# EAGLE board MAX3232_Breakout_Panel_v11 (EAGLE 7.1.0), part 1 of 3
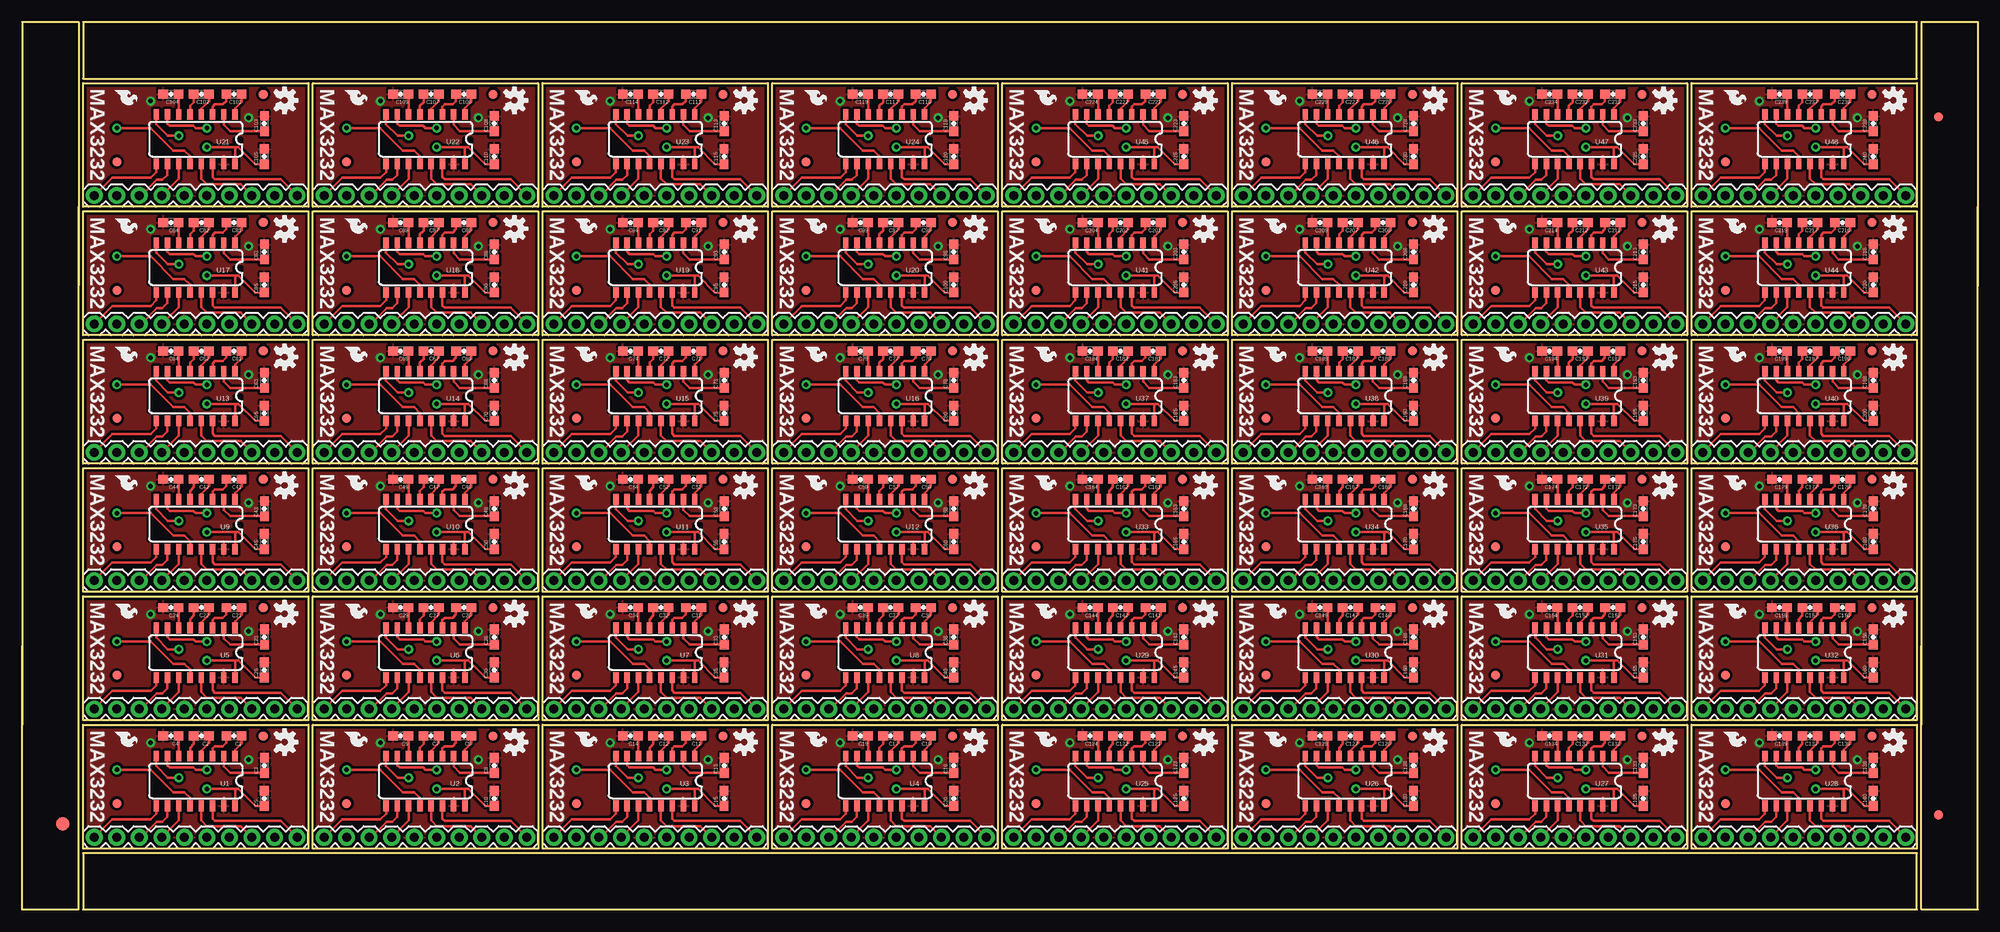
[diagram p0: board, top side]
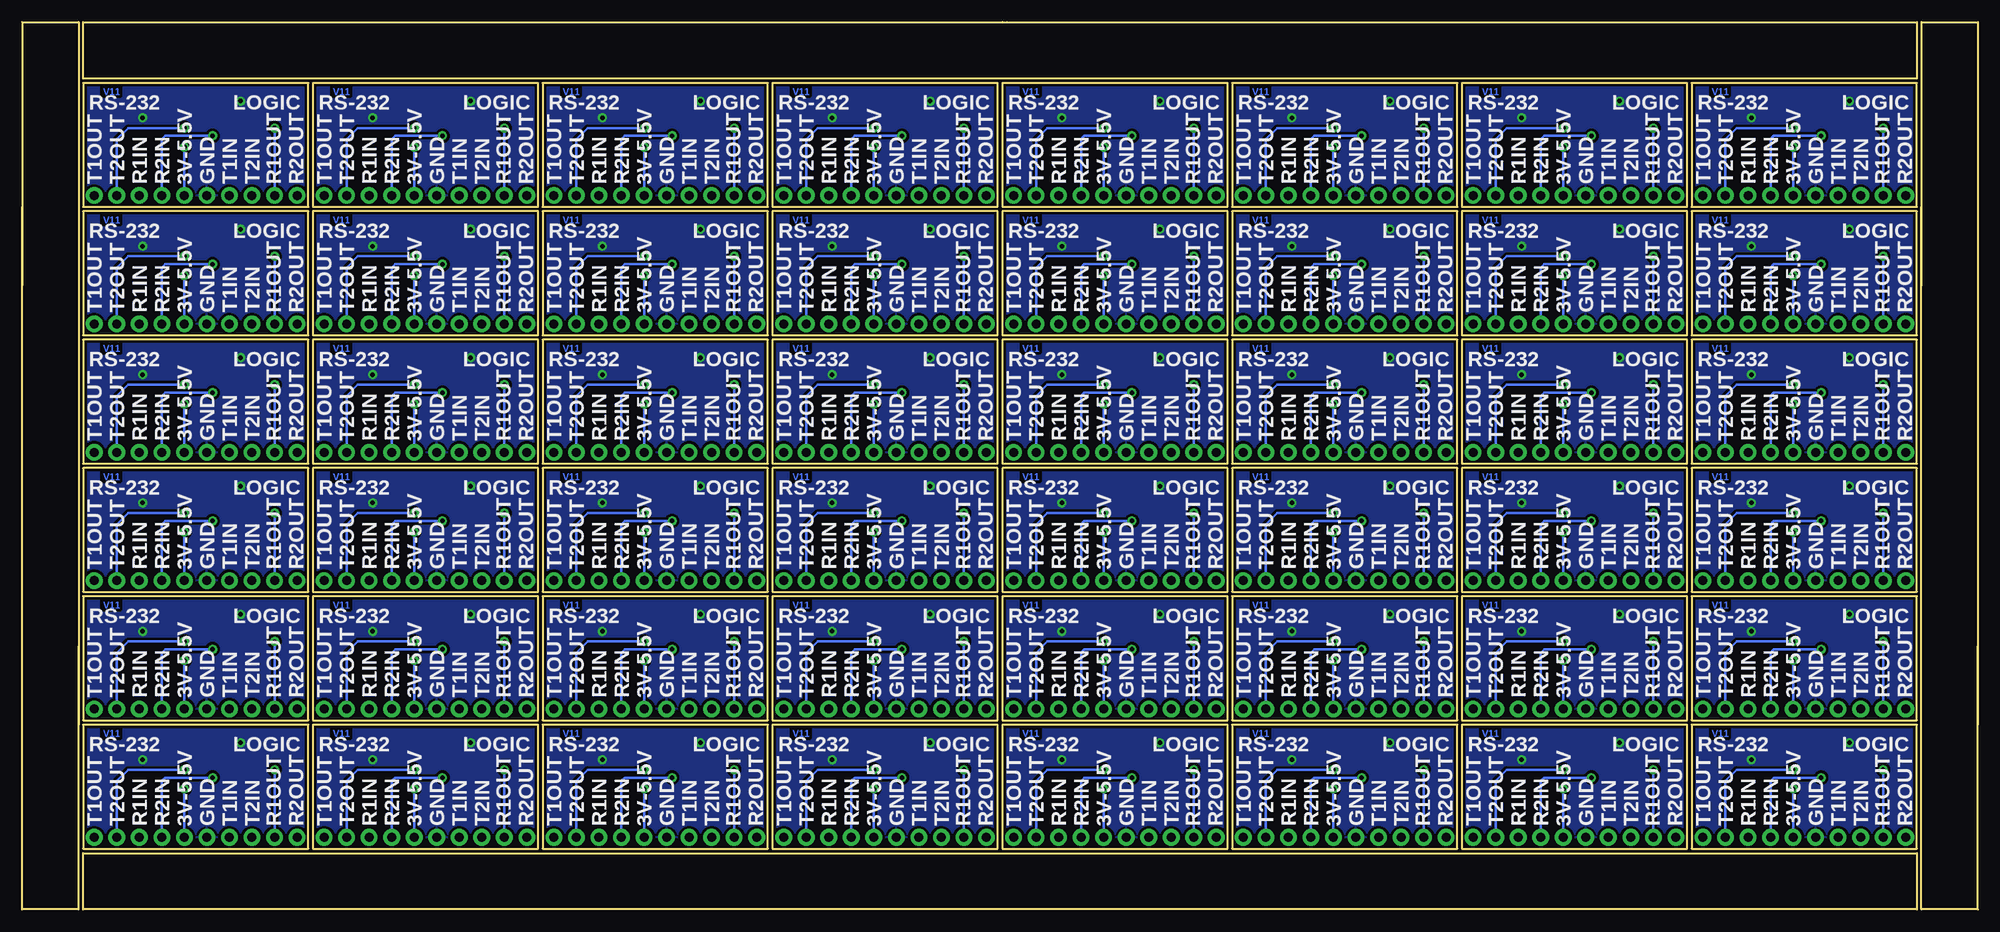
[diagram p1: board, bottom side, seen from below]

Size 220.47 x 100.08 mm. Coordinates in mm from the lower left corner, seen from the top.
Outline: 214 segments
Copper layers (1*16): Top 0.035mm / dielectric 1.5mm / Bottom 0.035mm
Design rules "SparkFun-2-layer": minimum track width 7mil, minimum drill 15mil, track to track 8mil, track to pad 8mil, pad to pad 8mil, via to via 8mil, smd to smd 8mil, copper to edge 8mil, drill to drill 8mil, minimum pad ring 12mil, minimum via ring 10mil, stop-mask expansion 4mil, vias tented up to drill 20mil, thermal gap 10mil
tRestrict: area 24,14.1 to 24.6,14.5; area 14.4,12.7 to 14.5,15.4; area 49.9,14.1 to 50.5,14.5; area 40.3,12.7 to 40.4,15.4; area 75.8,14.1 to 76.5,14.5; area 66.2,12.7 to 66.3,15.4; area 101.7,14.1 to 102.4,14.5; area 92.1,12.7 to 92.2,15.4; area 24,28.6 to 24.6,29; area 14.4,27.2 to 14.5,29.8; area 49.9,28.6 to 50.5,29; area 40.3,27.2 to 40.4,29.8; 36 more areas

## Footprints (pad centres in the part's own frame; a part is rotated, then mirrored left to right if it is on the bottom)
0603-CAP = smd 1.1 x 1: 1 -0.85,0; 2 0.85,0
FIDUCIAL-1.5X3 = smd 1.5 x 1.5: 1 0,0
FIDUCIAL-1X2 = smd 1 x 1: 1 0,0
1X10 = drill 1.016 pad 1.88: 1 0,0; 2 2.54,0; 3 5.08,0; 4 7.62,0; 5 10.16,0; 6 12.7,0; 7 15.24,0; 8 17.78,0; 9 20.32,0; 10 22.86,0
SO016 = smd 0.6 x 1.2: 1 -4.445,-2.8; 2 -3.175,-2.8; 3 -1.905,-2.8; 4 -0.635,-2.8; 5 0.635,-2.8; 6 1.905,-2.8; 7 3.175,-2.8; 8 4.445,-2.8; 9 4.445,2.8; 10 3.175,2.8; 11 1.905,2.8; 12 0.635,2.8; 13 -0.635,2.8; 14 -1.905,2.8; 15 -3.175,2.8; 16 -4.445,2.8

## Placement (x,y rotation side)
C1  .1uF  [0603-CAP]  23.88,19.56 180 top
C2  .1uF  [0603-CAP]  20.19,19.56 180 top
C3  .1uF  [0603-CAP]  27.31,16.25 90 top
C4  .1uF  [0603-CAP]  16.76,19.56 180 top
C5  .1uF  [0603-CAP]  27.31,12.53 90 top
C6  .1uF  [0603-CAP]  49.78,19.56 180 top
C7  .1uF  [0603-CAP]  46.1,19.56 180 top
C8  .1uF  [0603-CAP]  53.22,16.25 90 top
C9  .1uF  [0603-CAP]  42.67,19.56 180 top
C10  .1uF  [0603-CAP]  53.22,12.53 90 top
C11  .1uF  [0603-CAP]  75.69,19.56 180 top
C12  .1uF  [0603-CAP]  72.01,19.56 180 top
C13  .1uF  [0603-CAP]  79.13,16.25 90 top
C14  .1uF  [0603-CAP]  68.58,19.56 180 top
C15  .1uF  [0603-CAP]  79.13,12.53 90 top
C16  .1uF  [0603-CAP]  101.6,19.56 180 top
C17  .1uF  [0603-CAP]  97.92,19.56 180 top
C18  .1uF  [0603-CAP]  105.04,16.25 90 top
C19  .1uF  [0603-CAP]  94.49,19.56 180 top
C20  .1uF  [0603-CAP]  105.03,12.53 90 top
C21  .1uF  [0603-CAP]  23.88,34.04 180 top
C22  .1uF  [0603-CAP]  20.19,34.04 180 top
C23  .1uF  [0603-CAP]  27.31,30.72 90 top
C24  .1uF  [0603-CAP]  16.76,34.04 180 top
C25  .1uF  [0603-CAP]  27.31,27.01 90 top
C26  .1uF  [0603-CAP]  49.78,34.04 180 top
C27  .1uF  [0603-CAP]  46.1,34.04 180 top
C28  .1uF  [0603-CAP]  53.22,30.72 90 top
C29  .1uF  [0603-CAP]  42.67,34.04 180 top
C30  .1uF  [0603-CAP]  53.22,27.01 90 top
C31  .1uF  [0603-CAP]  75.69,34.04 180 top
C32  .1uF  [0603-CAP]  72.01,34.04 180 top
C33  .1uF  [0603-CAP]  79.13,30.72 90 top
C34  .1uF  [0603-CAP]  68.58,34.04 180 top
C35  .1uF  [0603-CAP]  79.13,27.01 90 top
C36  .1uF  [0603-CAP]  101.6,34.04 180 top
C37  .1uF  [0603-CAP]  97.92,34.04 180 top
C38  .1uF  [0603-CAP]  105.04,30.72 90 top
C39  .1uF  [0603-CAP]  94.49,34.04 180 top
C40  .1uF  [0603-CAP]  105.03,27.01 90 top
C41  .1uF  [0603-CAP]  23.88,48.51 180 top
C42  .1uF  [0603-CAP]  20.19,48.51 180 top
C43  .1uF  [0603-CAP]  27.31,45.2 90 top
C44  .1uF  [0603-CAP]  16.76,48.51 180 top
C45  .1uF  [0603-CAP]  27.31,41.48 90 top
C46  .1uF  [0603-CAP]  49.78,48.51 180 top
C47  .1uF  [0603-CAP]  46.1,48.51 180 top
C48  .1uF  [0603-CAP]  53.22,45.2 90 top
C49  .1uF  [0603-CAP]  42.67,48.51 180 top
C50  .1uF  [0603-CAP]  53.22,41.48 90 top
C51  .1uF  [0603-CAP]  75.69,48.51 180 top
C52  .1uF  [0603-CAP]  72.01,48.51 180 top
C53  .1uF  [0603-CAP]  79.13,45.2 90 top
C54  .1uF  [0603-CAP]  68.58,48.51 180 top
C55  .1uF  [0603-CAP]  79.13,41.48 90 top
C56  .1uF  [0603-CAP]  101.6,48.51 180 top
C57  .1uF  [0603-CAP]  97.92,48.51 180 top
C58  .1uF  [0603-CAP]  105.04,45.2 90 top
C59  .1uF  [0603-CAP]  94.49,48.51 180 top
C60  .1uF  [0603-CAP]  105.03,41.48 90 top
C61  .1uF  [0603-CAP]  23.88,62.99 180 top
C62  .1uF  [0603-CAP]  20.19,62.99 180 top
C63  .1uF  [0603-CAP]  27.31,59.68 90 top
C64  .1uF  [0603-CAP]  16.76,62.99 180 top
C65  .1uF  [0603-CAP]  27.31,55.96 90 top
C66  .1uF  [0603-CAP]  49.78,62.99 180 top
C67  .1uF  [0603-CAP]  46.1,62.99 180 top
C68  .1uF  [0603-CAP]  53.22,59.68 90 top
C69  .1uF  [0603-CAP]  42.67,62.99 180 top
C70  .1uF  [0603-CAP]  53.22,55.96 90 top
C71  .1uF  [0603-CAP]  75.69,62.99 180 top
C72  .1uF  [0603-CAP]  72.01,62.99 180 top
C73  .1uF  [0603-CAP]  79.13,59.68 90 top
C74  .1uF  [0603-CAP]  68.58,62.99 180 top
C75  .1uF  [0603-CAP]  79.13,55.96 90 top
C76  .1uF  [0603-CAP]  101.6,62.99 180 top
C77  .1uF  [0603-CAP]  97.92,62.99 180 top
C78  .1uF  [0603-CAP]  105.04,59.68 90 top
C79  .1uF  [0603-CAP]  94.49,62.99 180 top
C80  .1uF  [0603-CAP]  105.03,55.96 90 top
C81  .1uF  [0603-CAP]  23.88,77.47 180 top
C82  .1uF  [0603-CAP]  20.19,77.47 180 top
C83  .1uF  [0603-CAP]  27.31,74.16 90 top
C84  .1uF  [0603-CAP]  16.76,77.47 180 top
C85  .1uF  [0603-CAP]  27.31,70.44 90 top
C86  .1uF  [0603-CAP]  49.78,77.47 180 top
C87  .1uF  [0603-CAP]  46.1,77.47 180 top
C88  .1uF  [0603-CAP]  53.22,74.16 90 top
C89  .1uF  [0603-CAP]  42.67,77.47 180 top
C90  .1uF  [0603-CAP]  53.22,70.44 90 top
C91  .1uF  [0603-CAP]  75.69,77.47 180 top
C92  .1uF  [0603-CAP]  72.01,77.47 180 top
C93  .1uF  [0603-CAP]  79.13,74.16 90 top
C94  .1uF  [0603-CAP]  68.58,77.47 180 top
C95  .1uF  [0603-CAP]  79.13,70.44 90 top
C96  .1uF  [0603-CAP]  101.6,77.47 180 top
C97  .1uF  [0603-CAP]  97.92,77.47 180 top
C98  .1uF  [0603-CAP]  105.04,74.16 90 top
C99  .1uF  [0603-CAP]  94.49,77.47 180 top
C100  .1uF  [0603-CAP]  105.03,70.44 90 top
C101  .1uF  [0603-CAP]  23.88,91.95 180 top
C102  .1uF  [0603-CAP]  20.19,91.95 180 top
C103  .1uF  [0603-CAP]  27.31,88.64 90 top
C104  .1uF  [0603-CAP]  16.76,91.95 180 top
C105  .1uF  [0603-CAP]  27.31,84.92 90 top
C106  .1uF  [0603-CAP]  49.78,91.95 180 top
C107  .1uF  [0603-CAP]  46.1,91.95 180 top
C108  .1uF  [0603-CAP]  53.22,88.64 90 top
C109  .1uF  [0603-CAP]  42.67,91.95 180 top
C110  .1uF  [0603-CAP]  53.22,84.92 90 top
C111  .1uF  [0603-CAP]  75.69,91.95 180 top
C112  .1uF  [0603-CAP]  72.01,91.95 180 top
C113  .1uF  [0603-CAP]  79.13,88.64 90 top
C114  .1uF  [0603-CAP]  68.58,91.95 180 top
C115  .1uF  [0603-CAP]  79.13,84.92 90 top
C116  .1uF  [0603-CAP]  101.6,91.95 180 top
C117  .1uF  [0603-CAP]  97.92,91.95 180 top
C118  .1uF  [0603-CAP]  105.04,88.64 90 top
C119  .1uF  [0603-CAP]  94.49,91.95 180 top
C120  .1uF  [0603-CAP]  105.03,84.92 90 top
C121  .1uF  [0603-CAP]  127.51,19.56 180 top
C122  .1uF  [0603-CAP]  123.83,19.56 180 top
C123  .1uF  [0603-CAP]  130.94,16.25 90 top
C124  .1uF  [0603-CAP]  120.4,19.56 180 top
C125  .1uF  [0603-CAP]  130.94,12.53 90 top
C126  .1uF  [0603-CAP]  153.42,19.56 180 top
C127  .1uF  [0603-CAP]  149.73,19.56 180 top
C128  .1uF  [0603-CAP]  156.85,16.25 90 top
C129  .1uF  [0603-CAP]  146.3,19.56 180 top
C130  .1uF  [0603-CAP]  156.85,12.53 90 top
C131  .1uF  [0603-CAP]  179.32,19.56 180 top
C132  .1uF  [0603-CAP]  175.64,19.56 180 top
C133  .1uF  [0603-CAP]  182.76,16.25 90 top
C134  .1uF  [0603-CAP]  172.21,19.56 180 top
C135  .1uF  [0603-CAP]  182.76,12.53 90 top
C136  .1uF  [0603-CAP]  205.23,19.56 180 top
C137  .1uF  [0603-CAP]  201.55,19.56 180 top
C138  .1uF  [0603-CAP]  208.67,16.25 90 top
C139  .1uF  [0603-CAP]  198.12,19.56 180 top
C140  .1uF  [0603-CAP]  208.67,12.53 90 top
C141  .1uF  [0603-CAP]  127.51,34.04 180 top
C142  .1uF  [0603-CAP]  123.83,34.04 180 top
C143  .1uF  [0603-CAP]  130.94,30.72 90 top
C144  .1uF  [0603-CAP]  120.4,34.04 180 top
C145  .1uF  [0603-CAP]  130.94,27.01 90 top
C146  .1uF  [0603-CAP]  153.42,34.04 180 top
C147  .1uF  [0603-CAP]  149.73,34.04 180 top
C148  .1uF  [0603-CAP]  156.85,30.72 90 top
C149  .1uF  [0603-CAP]  146.3,34.04 180 top
C150  .1uF  [0603-CAP]  156.85,27.01 90 top
C151  .1uF  [0603-CAP]  179.32,34.04 180 top
C152  .1uF  [0603-CAP]  175.64,34.04 180 top
C153  .1uF  [0603-CAP]  182.76,30.72 90 top
C154  .1uF  [0603-CAP]  172.21,34.04 180 top
C155  .1uF  [0603-CAP]  182.76,27.01 90 top
C156  .1uF  [0603-CAP]  205.23,34.04 180 top
C157  .1uF  [0603-CAP]  201.55,34.04 180 top
C158  .1uF  [0603-CAP]  208.67,30.72 90 top
C159  .1uF  [0603-CAP]  198.12,34.04 180 top
C160  .1uF  [0603-CAP]  208.67,27.01 90 top
C161  .1uF  [0603-CAP]  127.51,48.51 180 top
C162  .1uF  [0603-CAP]  123.83,48.51 180 top
C163  .1uF  [0603-CAP]  130.94,45.2 90 top
C164  .1uF  [0603-CAP]  120.4,48.51 180 top
C165  .1uF  [0603-CAP]  130.94,41.48 90 top
C166  .1uF  [0603-CAP]  153.42,48.51 180 top
C167  .1uF  [0603-CAP]  149.73,48.51 180 top
C168  .1uF  [0603-CAP]  156.85,45.2 90 top
C169  .1uF  [0603-CAP]  146.3,48.51 180 top
C170  .1uF  [0603-CAP]  156.85,41.48 90 top
C171  .1uF  [0603-CAP]  179.32,48.51 180 top
C172  .1uF  [0603-CAP]  175.64,48.51 180 top
C173  .1uF  [0603-CAP]  182.76,45.2 90 top
C174  .1uF  [0603-CAP]  172.21,48.51 180 top
C175  .1uF  [0603-CAP]  182.76,41.48 90 top
C176  .1uF  [0603-CAP]  205.23,48.51 180 top
C177  .1uF  [0603-CAP]  201.55,48.51 180 top
C178  .1uF  [0603-CAP]  208.67,45.2 90 top
C179  .1uF  [0603-CAP]  198.12,48.51 180 top
C180  .1uF  [0603-CAP]  208.67,41.48 90 top
C181  .1uF  [0603-CAP]  127.51,62.99 180 top
C182  .1uF  [0603-CAP]  123.83,62.99 180 top
C183  .1uF  [0603-CAP]  130.94,59.68 90 top
C184  .1uF  [0603-CAP]  120.4,62.99 180 top
C185  .1uF  [0603-CAP]  130.94,55.96 90 top
C186  .1uF  [0603-CAP]  153.42,62.99 180 top
C187  .1uF  [0603-CAP]  149.73,62.99 180 top
C188  .1uF  [0603-CAP]  156.85,59.68 90 top
C189  .1uF  [0603-CAP]  146.3,62.99 180 top
C190  .1uF  [0603-CAP]  156.85,55.96 90 top
C191  .1uF  [0603-CAP]  179.32,62.99 180 top
C192  .1uF  [0603-CAP]  175.64,62.99 180 top
C193  .1uF  [0603-CAP]  182.76,59.68 90 top
C194  .1uF  [0603-CAP]  172.21,62.99 180 top
C195  .1uF  [0603-CAP]  182.76,55.96 90 top
C196  .1uF  [0603-CAP]  205.23,62.99 180 top
C197  .1uF  [0603-CAP]  201.55,62.99 180 top
C198  .1uF  [0603-CAP]  208.67,59.68 90 top
C199  .1uF  [0603-CAP]  198.12,62.99 180 top
C200  .1uF  [0603-CAP]  208.67,55.96 90 top
C201  .1uF  [0603-CAP]  127.51,77.47 180 top
C202  .1uF  [0603-CAP]  123.83,77.47 180 top
C203  .1uF  [0603-CAP]  130.94,74.16 90 top
C204  .1uF  [0603-CAP]  120.4,77.47 180 top
C205  .1uF  [0603-CAP]  130.94,70.44 90 top
C206  .1uF  [0603-CAP]  153.42,77.47 180 top
C207  .1uF  [0603-CAP]  149.73,77.47 180 top
C208  .1uF  [0603-CAP]  156.85,74.16 90 top
C209  .1uF  [0603-CAP]  146.3,77.47 180 top
C210  .1uF  [0603-CAP]  156.85,70.44 90 top
C211  .1uF  [0603-CAP]  179.32,77.47 180 top
C212  .1uF  [0603-CAP]  175.64,77.47 180 top
C213  .1uF  [0603-CAP]  182.76,74.16 90 top
C214  .1uF  [0603-CAP]  172.21,77.47 180 top
C215  .1uF  [0603-CAP]  182.76,70.44 90 top
C216  .1uF  [0603-CAP]  205.23,77.47 180 top
C217  .1uF  [0603-CAP]  201.55,77.47 180 top
C218  .1uF  [0603-CAP]  208.67,74.16 90 top
C219  .1uF  [0603-CAP]  198.12,77.47 180 top
C220  .1uF  [0603-CAP]  208.67,70.44 90 top
C221  .1uF  [0603-CAP]  127.51,91.95 180 top
C222  .1uF  [0603-CAP]  123.83,91.95 180 top
C223  .1uF  [0603-CAP]  130.94,88.64 90 top
C224  .1uF  [0603-CAP]  120.4,91.95 180 top
C225  .1uF  [0603-CAP]  130.94,84.92 90 top
C226  .1uF  [0603-CAP]  153.42,91.95 180 top
C227  .1uF  [0603-CAP]  149.73,91.95 180 top
C228  .1uF  [0603-CAP]  156.85,88.64 90 top
C229  .1uF  [0603-CAP]  146.3,91.95 180 top
C230  .1uF  [0603-CAP]  156.85,84.92 90 top
C231  .1uF  [0603-CAP]  179.32,91.95 180 top
C232  .1uF  [0603-CAP]  175.64,91.95 180 top
C233  .1uF  [0603-CAP]  182.76,88.64 90 top
C234  .1uF  [0603-CAP]  172.21,91.95 180 top
C235  .1uF  [0603-CAP]  182.76,84.92 90 top
C236  .1uF  [0603-CAP]  205.23,91.95 180 top
C237  .1uF  [0603-CAP]  201.55,91.95 180 top
C238  .1uF  [0603-CAP]  208.67,88.64 90 top
C239  .1uF  [0603-CAP]  198.12,91.95 180 top
C240  .1uF  [0603-CAP]  208.67,84.92 90 top
E$1  [FIDUCIAL-1.5X3]  4.57,9.65 0 top
E$4  [FIDUCIAL-1X2]  216.03,10.67 0 top
E$5  [FIDUCIAL-1X2]  216.03,89.41 180 top
FID1  FIDUCIAL1X2  [FIDUCIAL-1X2]  10.67,11.94 0 top
FID2  FIDUCIAL1X2  [FIDUCIAL-1X2]  27.18,19.56 0 top
FID3  FIDUCIAL1X2  [FIDUCIAL-1X2]  36.58,11.94 0 top
FID4  FIDUCIAL1X2  [FIDUCIAL-1X2]  53.09,19.56 0 top
FID5  FIDUCIAL1X2  [FIDUCIAL-1X2]  62.48,11.94 0 top
FID6  FIDUCIAL1X2  [FIDUCIAL-1X2]  78.99,19.56 0 top
FID7  FIDUCIAL1X2  [FIDUCIAL-1X2]  88.39,11.94 0 top
FID8  FIDUCIAL1X2  [FIDUCIAL-1X2]  104.9,19.56 0 top
FID9  FIDUCIAL1X2  [FIDUCIAL-1X2]  10.67,26.42 0 top
FID10  FIDUCIAL1X2  [FIDUCIAL-1X2]  27.18,34.04 0 top
FID11  FIDUCIAL1X2  [FIDUCIAL-1X2]  36.58,26.42 0 top
FID12  FIDUCIAL1X2  [FIDUCIAL-1X2]  53.09,34.04 0 top
FID13  FIDUCIAL1X2  [FIDUCIAL-1X2]  62.48,26.42 0 top
FID14  FIDUCIAL1X2  [FIDUCIAL-1X2]  78.99,34.04 0 top
FID15  FIDUCIAL1X2  [FIDUCIAL-1X2]  88.39,26.42 0 top
FID16  FIDUCIAL1X2  [FIDUCIAL-1X2]  104.9,34.04 0 top
FID17  FIDUCIAL1X2  [FIDUCIAL-1X2]  10.67,40.89 0 top
FID18  FIDUCIAL1X2  [FIDUCIAL-1X2]  27.18,48.51 0 top
FID19  FIDUCIAL1X2  [FIDUCIAL-1X2]  36.58,40.89 0 top
FID20  FIDUCIAL1X2  [FIDUCIAL-1X2]  53.09,48.51 0 top
FID21  FIDUCIAL1X2  [FIDUCIAL-1X2]  62.48,40.89 0 top
FID22  FIDUCIAL1X2  [FIDUCIAL-1X2]  78.99,48.51 0 top
FID23  FIDUCIAL1X2  [FIDUCIAL-1X2]  88.39,40.89 0 top
FID24  FIDUCIAL1X2  [FIDUCIAL-1X2]  104.9,48.51 0 top
FID25  FIDUCIAL1X2  [FIDUCIAL-1X2]  10.67,55.37 0 top
FID26  FIDUCIAL1X2  [FIDUCIAL-1X2]  27.18,62.99 0 top
FID27  FIDUCIAL1X2  [FIDUCIAL-1X2]  36.58,55.37 0 top
FID28  FIDUCIAL1X2  [FIDUCIAL-1X2]  53.09,62.99 0 top
FID29  FIDUCIAL1X2  [FIDUCIAL-1X2]  62.48,55.37 0 top
FID30  FIDUCIAL1X2  [FIDUCIAL-1X2]  78.99,62.99 0 top
FID31  FIDUCIAL1X2  [FIDUCIAL-1X2]  88.39,55.37 0 top
FID32  FIDUCIAL1X2  [FIDUCIAL-1X2]  104.9,62.99 0 top
FID33  FIDUCIAL1X2  [FIDUCIAL-1X2]  10.67,69.85 0 top
FID34  FIDUCIAL1X2  [FIDUCIAL-1X2]  27.18,77.47 0 top
FID35  FIDUCIAL1X2  [FIDUCIAL-1X2]  36.58,69.85 0 top
FID36  FIDUCIAL1X2  [FIDUCIAL-1X2]  53.09,77.47 0 top
FID37  FIDUCIAL1X2  [FIDUCIAL-1X2]  62.48,69.85 0 top
FID38  FIDUCIAL1X2  [FIDUCIAL-1X2]  78.99,77.47 0 top
FID39  FIDUCIAL1X2  [FIDUCIAL-1X2]  88.39,69.85 0 top
FID40  FIDUCIAL1X2  [FIDUCIAL-1X2]  104.9,77.47 0 top
FID41  FIDUCIAL1X2  [FIDUCIAL-1X2]  10.67,84.33 0 top
FID42  FIDUCIAL1X2  [FIDUCIAL-1X2]  27.18,91.95 0 top
FID43  FIDUCIAL1X2  [FIDUCIAL-1X2]  36.58,84.33 0 top
FID44  FIDUCIAL1X2  [FIDUCIAL-1X2]  53.09,91.95 0 top
FID45  FIDUCIAL1X2  [FIDUCIAL-1X2]  62.48,84.33 0 top
FID46  FIDUCIAL1X2  [FIDUCIAL-1X2]  78.99,91.95 0 top
FID47  FIDUCIAL1X2  [FIDUCIAL-1X2]  88.39,84.33 0 top
FID48  FIDUCIAL1X2  [FIDUCIAL-1X2]  104.9,91.95 0 top
FID49  FIDUCIAL1X2  [FIDUCIAL-1X2]  114.3,11.94 0 top
FID50  FIDUCIAL1X2  [FIDUCIAL-1X2]  130.81,19.56 0 top
FID51  FIDUCIAL1X2  [FIDUCIAL-1X2]  140.21,11.94 0 top
FID52  FIDUCIAL1X2  [FIDUCIAL-1X2]  156.72,19.56 0 top
FID53  FIDUCIAL1X2  [FIDUCIAL-1X2]  166.12,11.94 0 top
FID54  FIDUCIAL1X2  [FIDUCIAL-1X2]  182.63,19.56 0 top
FID55  FIDUCIAL1X2  [FIDUCIAL-1X2]  192.02,11.94 0 top
FID56  FIDUCIAL1X2  [FIDUCIAL-1X2]  208.53,19.56 0 top
FID57  FIDUCIAL1X2  [FIDUCIAL-1X2]  114.3,26.42 0 top
FID58  FIDUCIAL1X2  [FIDUCIAL-1X2]  130.81,34.04 0 top
FID59  FIDUCIAL1X2  [FIDUCIAL-1X2]  140.21,26.42 0 top
FID60  FIDUCIAL1X2  [FIDUCIAL-1X2]  156.72,34.04 0 top
FID61  FIDUCIAL1X2  [FIDUCIAL-1X2]  166.12,26.42 0 top
FID62  FIDUCIAL1X2  [FIDUCIAL-1X2]  182.63,34.04 0 top
FID63  FIDUCIAL1X2  [FIDUCIAL-1X2]  192.02,26.42 0 top
FID64  FIDUCIAL1X2  [FIDUCIAL-1X2]  208.53,34.04 0 top
FID65  FIDUCIAL1X2  [FIDUCIAL-1X2]  114.3,40.89 0 top
FID66  FIDUCIAL1X2  [FIDUCIAL-1X2]  130.81,48.51 0 top
FID67  FIDUCIAL1X2  [FIDUCIAL-1X2]  140.21,40.89 0 top
FID68  FIDUCIAL1X2  [FIDUCIAL-1X2]  156.72,48.51 0 top
FID69  FIDUCIAL1X2  [FIDUCIAL-1X2]  166.12,40.89 0 top
FID70  FIDUCIAL1X2  [FIDUCIAL-1X2]  182.63,48.51 0 top
FID71  FIDUCIAL1X2  [FIDUCIAL-1X2]  192.02,40.89 0 top
FID72  FIDUCIAL1X2  [FIDUCIAL-1X2]  208.53,48.51 0 top
FID73  FIDUCIAL1X2  [FIDUCIAL-1X2]  114.3,55.37 0 top
FID74  FIDUCIAL1X2  [FIDUCIAL-1X2]  130.81,62.99 0 top
FID75  FIDUCIAL1X2  [FIDUCIAL-1X2]  140.21,55.37 0 top
FID76  FIDUCIAL1X2  [FIDUCIAL-1X2]  156.72,62.99 0 top
FID77  FIDUCIAL1X2  [FIDUCIAL-1X2]  166.12,55.37 0 top
FID78  FIDUCIAL1X2  [FIDUCIAL-1X2]  182.63,62.99 0 top
FID79  FIDUCIAL1X2  [FIDUCIAL-1X2]  192.02,55.37 0 top
FID80  FIDUCIAL1X2  [FIDUCIAL-1X2]  208.53,62.99 0 top
FID81  FIDUCIAL1X2  [FIDUCIAL-1X2]  114.3,69.85 0 top
FID82  FIDUCIAL1X2  [FIDUCIAL-1X2]  130.81,77.47 0 top
FID83  FIDUCIAL1X2  [FIDUCIAL-1X2]  140.21,69.85 0 top
FID84  FIDUCIAL1X2  [FIDUCIAL-1X2]  156.72,77.47 0 top
FID85  FIDUCIAL1X2  [FIDUCIAL-1X2]  166.12,69.85 0 top
FID86  FIDUCIAL1X2  [FIDUCIAL-1X2]  182.63,77.47 0 top
FID87  FIDUCIAL1X2  [FIDUCIAL-1X2]  192.02,69.85 0 top
FID88  FIDUCIAL1X2  [FIDUCIAL-1X2]  208.53,77.47 0 top
FID89  FIDUCIAL1X2  [FIDUCIAL-1X2]  114.3,84.33 0 top
FID90  FIDUCIAL1X2  [FIDUCIAL-1X2]  130.81,91.95 0 top
FID91  FIDUCIAL1X2  [FIDUCIAL-1X2]  140.21,84.33 0 top
FID92  FIDUCIAL1X2  [FIDUCIAL-1X2]  156.72,91.95 0 top
FID93  FIDUCIAL1X2  [FIDUCIAL-1X2]  166.12,84.33 0 top
FID94  FIDUCIAL1X2  [FIDUCIAL-1X2]  182.63,91.95 0 top
FID95  FIDUCIAL1X2  [FIDUCIAL-1X2]  192.02,84.33 0 top
FID96  FIDUCIAL1X2  [FIDUCIAL-1X2]  208.53,91.95 0 top
JP1  M10"  [1X10]  56.9,8.13 180 top
JP2  M10"  [1X10]  30.99,8.13 180 top
JP3  M10"  [1X10]  82.8,8.13 180 top
JP4  M10"  [1X10]  108.71,8.13 180 top
JP5  M10"  [1X10]  30.99,22.61 180 top
JP6  M10"  [1X10]  56.9,22.61 180 top
JP7  M10"  [1X10]  82.8,22.61 180 top
JP8  M10"  [1X10]  108.71,22.61 180 top
JP9  M10"  [1X10]  30.99,37.08 180 top
JP10  M10"  [1X10]  56.9,37.08 180 top
JP11  M10"  [1X10]  82.8,37.08 180 top
JP12  M10"  [1X10]  108.71,37.08 180 top
JP13  M10"  [1X10]  30.99,51.56 180 top
JP14  M10"  [1X10]  56.9,51.56 180 top
JP15  M10"  [1X10]  82.8,51.56 180 top
JP16  M10"  [1X10]  108.71,51.56 180 top
JP17  M10"  [1X10]  30.99,66.04 180 top
JP18  M10"  [1X10]  56.9,66.04 180 top
JP19  M10"  [1X10]  82.8,66.04 180 top
JP20  M10"  [1X10]  108.71,66.04 180 top
JP21  M10"  [1X10]  30.99,80.52 180 top
JP22  M10"  [1X10]  56.9,80.52 180 top
JP23  M10"  [1X10]  82.8,80.52 180 top
JP24  M10"  [1X10]  108.71,80.52 180 top
JP25  M10"  [1X10]  134.62,8.13 180 top
JP26  M10"  [1X10]  160.53,8.13 180 top
JP27  M10"  [1X10]  186.44,8.13 180 top
JP28  M10"  [1X10]  212.34,8.13 180 top
JP29  M10"  [1X10]  134.62,22.61 180 top
JP30  M10"  [1X10]  160.53,22.61 180 top
JP31  M10"  [1X10]  186.44,22.61 180 top
JP32  M10"  [1X10]  212.34,22.61 180 top
JP33  M10"  [1X10]  134.62,37.08 180 top
JP34  M10"  [1X10]  160.53,37.08 180 top
JP35  M10"  [1X10]  186.44,37.08 180 top
JP36  M10"  [1X10]  212.34,37.08 180 top
JP37  M10"  [1X10]  134.62,51.56 180 top
JP38  M10"  [1X10]  160.53,51.56 180 top
JP39  M10"  [1X10]  186.44,51.56 180 top
JP40  M10"  [1X10]  212.34,51.56 180 top
JP41  M10"  [1X10]  134.62,66.04 180 top
JP42  M10"  [1X10]  160.53,66.04 180 top
JP43  M10"  [1X10]  186.44,66.04 180 top
JP44  M10"  [1X10]  212.34,66.04 180 top
JP45  M10"  [1X10]  134.62,80.52 180 top
JP46  M10"  [1X10]  160.53,80.52 180 top
JP47  M10"  [1X10]  186.44,80.52 180 top
JP48  M10"  [1X10]  212.34,80.52 180 top
LOGO1  SFE_LOGO_FLAME.1_INCH  [SFE_LOGO_FLAME_.1]  10.1,20.32 270 top
LOGO2  SFE_LOGO_FLAME.1_INCH  [SFE_LOGO_FLAME_.1]  36.01,20.32 270 top
LOGO3  SFE_LOGO_FLAME.1_INCH  [SFE_LOGO_FLAME_.1]  61.92,20.32 270 top
LOGO4  SFE_LOGO_FLAME.1_INCH  [SFE_LOGO_FLAME_.1]  87.82,20.32 270 top
LOGO5  SFE_LOGO_FLAME.1_INCH  [SFE_LOGO_FLAME_.1]  10.1,34.8 270 top
LOGO6  SFE_LOGO_FLAME.1_INCH  [SFE_LOGO_FLAME_.1]  36.01,34.8 270 top
LOGO7  SFE_LOGO_FLAME.1_INCH  [SFE_LOGO_FLAME_.1]  61.92,34.8 270 top
LOGO8  SFE_LOGO_FLAME.1_INCH  [SFE_LOGO_FLAME_.1]  87.82,34.8 270 top
LOGO9  SFE_LOGO_FLAME.1_INCH  [SFE_LOGO_FLAME_.1]  10.1,49.28 270 top
LOGO10  SFE_LOGO_FLAME.1_INCH  [SFE_LOGO_FLAME_.1]  36.01,49.28 270 top
LOGO11  SFE_LOGO_FLAME.1_INCH  [SFE_LOGO_FLAME_.1]  61.92,49.28 270 top
LOGO12  SFE_LOGO_FLAME.1_INCH  [SFE_LOGO_FLAME_.1]  87.82,49.28 270 top
LOGO13  SFE_LOGO_FLAME.1_INCH  [SFE_LOGO_FLAME_.1]  10.1,63.75 270 top
LOGO14  SFE_LOGO_FLAME.1_INCH  [SFE_LOGO_FLAME_.1]  36.01,63.75 270 top
LOGO15  SFE_LOGO_FLAME.1_INCH  [SFE_LOGO_FLAME_.1]  61.92,63.75 270 top
LOGO16  SFE_LOGO_FLAME.1_INCH  [SFE_LOGO_FLAME_.1]  87.82,63.75 270 top
LOGO17  SFE_LOGO_FLAME.1_INCH  [SFE_LOGO_FLAME_.1]  10.1,78.23 270 top
LOGO18  SFE_LOGO_FLAME.1_INCH  [SFE_LOGO_FLAME_.1]  36.01,78.23 270 top
LOGO19  SFE_LOGO_FLAME.1_INCH  [SFE_LOGO_FLAME_.1]  61.92,78.23 270 top
LOGO20  SFE_LOGO_FLAME.1_INCH  [SFE_LOGO_FLAME_.1]  87.82,78.23 270 top
LOGO21  SFE_LOGO_FLAME.1_INCH  [SFE_LOGO_FLAME_.1]  10.1,92.71 270 top
LOGO22  SFE_LOGO_FLAME.1_INCH  [SFE_LOGO_FLAME_.1]  36.01,92.71 270 top
LOGO23  SFE_LOGO_FLAME.1_INCH  [SFE_LOGO_FLAME_.1]  61.92,92.71 270 top
LOGO24  SFE_LOGO_FLAME.1_INCH  [SFE_LOGO_FLAME_.1]  87.82,92.71 270 top
LOGO25  SFE_LOGO_FLAME.1_INCH  [SFE_LOGO_FLAME_.1]  113.73,20.32 270 top
LOGO26  SFE_LOGO_FLAME.1_INCH  [SFE_LOGO_FLAME_.1]  139.64,20.32 270 top
LOGO27  SFE_LOGO_FLAME.1_INCH  [SFE_LOGO_FLAME_.1]  165.55,20.32 270 top
LOGO28  SFE_LOGO_FLAME.1_INCH  [SFE_LOGO_FLAME_.1]  191.46,20.32 270 top
LOGO29  SFE_LOGO_FLAME.1_INCH  [SFE_LOGO_FLAME_.1]  113.73,34.8 270 top
LOGO30  SFE_LOGO_FLAME.1_INCH  [SFE_LOGO_FLAME_.1]  139.64,34.8 270 top
LOGO31  SFE_LOGO_FLAME.1_INCH  [SFE_LOGO_FLAME_.1]  165.55,34.8 270 top
LOGO32  SFE_LOGO_FLAME.1_INCH  [SFE_LOGO_FLAME_.1]  191.46,34.8 270 top
LOGO33  SFE_LOGO_FLAME.1_INCH  [SFE_LOGO_FLAME_.1]  113.73,49.28 270 top
LOGO34  SFE_LOGO_FLAME.1_INCH  [SFE_LOGO_FLAME_.1]  139.64,49.28 270 top
LOGO35  SFE_LOGO_FLAME.1_INCH  [SFE_LOGO_FLAME_.1]  165.55,49.28 270 top
LOGO36  SFE_LOGO_FLAME.1_INCH  [SFE_LOGO_FLAME_.1]  191.46,49.28 270 top
LOGO37  SFE_LOGO_FLAME.1_INCH  [SFE_LOGO_FLAME_.1]  113.73,63.75 270 top
LOGO38  SFE_LOGO_FLAME.1_INCH  [SFE_LOGO_FLAME_.1]  139.64,63.75 270 top
LOGO39  SFE_LOGO_FLAME.1_INCH  [SFE_LOGO_FLAME_.1]  165.55,63.75 270 top
LOGO40  SFE_LOGO_FLAME.1_INCH  [SFE_LOGO_FLAME_.1]  191.46,63.75 270 top
LOGO41  SFE_LOGO_FLAME.1_INCH  [SFE_LOGO_FLAME_.1]  113.73,78.23 270 top
LOGO42  SFE_LOGO_FLAME.1_INCH  [SFE_LOGO_FLAME_.1]  139.64,78.23 270 top
LOGO43  SFE_LOGO_FLAME.1_INCH  [SFE_LOGO_FLAME_.1]  165.55,78.23 270 top
LOGO44  SFE_LOGO_FLAME.1_INCH  [SFE_LOGO_FLAME_.1]  191.46,78.23 270 top
LOGO45  SFE_LOGO_FLAME.1_INCH  [SFE_LOGO_FLAME_.1]  113.73,92.71 270 top
LOGO46  SFE_LOGO_FLAME.1_INCH  [SFE_LOGO_FLAME_.1]  139.64,92.71 270 top
LOGO47  SFE_LOGO_FLAME.1_INCH  [SFE_LOGO_FLAME_.1]  165.55,92.71 270 top
LOGO48  SFE_LOGO_FLAME.1_INCH  [SFE_LOGO_FLAME_.1]  191.46,92.71 270 top
U1  MAX3232  [SO016]  19.56,14.48 180 top
U2  MAX3232  [SO016]  45.47,14.48 180 top
U3  MAX3232  [SO016]  71.37,14.48 180 top
U4  MAX3232  [SO016]  97.28,14.48 180 top
U5  MAX3232  [SO016]  19.56,28.96 180 top
U6  MAX3232  [SO016]  45.47,28.96 180 top
U7  MAX3232  [SO016]  71.37,28.96 180 top
U8  MAX3232  [SO016]  97.28,28.96 180 top
U9  MAX3232  [SO016]  19.56,43.43 180 top
U10  MAX3232  [SO016]  45.47,43.43 180 top
U11  MAX3232  [SO016]  71.37,43.43 180 top
U12  MAX3232  [SO016]  97.28,43.43 180 top
U13  MAX3232  [SO016]  19.56,57.91 180 top
U14  MAX3232  [SO016]  45.47,57.91 180 top
U15  MAX3232  [SO016]  71.37,57.91 180 top
U16  MAX3232  [SO016]  97.28,57.91 180 top
U17  MAX3232  [SO016]  19.56,72.39 180 top
U18  MAX3232  [SO016]  45.47,72.39 180 top
U19  MAX3232  [SO016]  71.37,72.39 180 top
U20  MAX3232  [SO016]  97.28,72.39 180 top
U21  MAX3232  [SO016]  19.56,86.87 180 top
U22  MAX3232  [SO016]  45.47,86.87 180 top
U23  MAX3232  [SO016]  71.37,86.87 180 top
U24  MAX3232  [SO016]  97.28,86.87 180 top
U25  MAX3232  [SO016]  123.19,14.48 180 top
U26  MAX3232  [SO016]  149.1,14.48 180 top
U27  MAX3232  [SO016]  175.01,14.48 180 top
U28  MAX3232  [SO016]  200.91,14.48 180 top
U29  MAX3232  [SO016]  123.19,28.96 180 top
U30  MAX3232  [SO016]  149.1,28.96 180 top
U31  MAX3232  [SO016]  175.01,28.96 180 top
U32  MAX3232  [SO016]  200.91,28.96 180 top
U33  MAX3232  [SO016]  123.19,43.43 180 top
U34  MAX3232  [SO016]  149.1,43.43 180 top
U35  MAX3232  [SO016]  175.01,43.43 180 top
U36  MAX3232  [SO016]  200.91,43.43 180 top
U37  MAX3232  [SO016]  123.19,57.91 180 top
U38  MAX3232  [SO016]  149.1,57.91 180 top
U39  MAX3232  [SO016]  175.01,57.91 180 top
U40  MAX3232  [SO016]  200.91,57.91 180 top
U41  MAX3232  [SO016]  123.19,72.39 180 top
U42  MAX3232  [SO016]  149.1,72.39 180 top
U43  MAX3232  [SO016]  175.01,72.39 180 top
U44  MAX3232  [SO016]  200.91,72.39 180 top
U45  MAX3232  [SO016]  123.19,86.87 180 top
U46  MAX3232  [SO016]  149.1,86.87 180 top
U47  MAX3232  [SO016]  175.01,86.87 180 top
U48  MAX3232  [SO016]  200.91,86.87 180 top
U$1  OSHW-LOGOS  [OSHW-LOGO-S]  29.59,18.87 270 top
U$2  OSHW-LOGOS  [OSHW-LOGO-S]  55.49,18.87 270 top
U$3  OSHW-LOGOS  [OSHW-LOGO-S]  81.4,18.87 270 top
U$4  OSHW-LOGOS  [OSHW-LOGO-S]  107.31,18.87 270 top
U$5  OSHW-LOGOS  [OSHW-LOGO-S]  29.59,33.35 270 top
U$6  OSHW-LOGOS  [OSHW-LOGO-S]  55.49,33.35 270 top
U$7  OSHW-LOGOS  [OSHW-LOGO-S]  81.4,33.35 270 top
U$8  OSHW-LOGOS  [OSHW-LOGO-S]  107.31,33.35 270 top
U$9  OSHW-LOGOS  [OSHW-LOGO-S]  29.59,47.83 270 top
U$10  OSHW-LOGOS  [OSHW-LOGO-S]  55.49,47.83 270 top
U$11  OSHW-LOGOS  [OSHW-LOGO-S]  81.4,47.83 270 top
U$12  OSHW-LOGOS  [OSHW-LOGO-S]  107.31,47.83 270 top
U$13  OSHW-LOGOS  [OSHW-LOGO-S]  29.59,62.3 270 top
U$14  OSHW-LOGOS  [OSHW-LOGO-S]  55.49,62.3 270 top
U$15  OSHW-LOGOS  [OSHW-LOGO-S]  81.4,62.3 270 top
U$16  OSHW-LOGOS  [OSHW-LOGO-S]  107.31,62.3 270 top
U$17  OSHW-LOGOS  [OSHW-LOGO-S]  29.59,76.78 270 top
U$18  OSHW-LOGOS  [OSHW-LOGO-S]  55.49,76.78 270 top
U$19  OSHW-LOGOS  [OSHW-LOGO-S]  81.4,76.78 270 top
U$20  OSHW-LOGOS  [OSHW-LOGO-S]  107.31,76.78 270 top
U$21  OSHW-LOGOS  [OSHW-LOGO-S]  29.59,91.26 270 top
U$22  OSHW-LOGOS  [OSHW-LOGO-S]  55.49,91.26 270 top
U$23  OSHW-LOGOS  [OSHW-LOGO-S]  81.4,91.26 270 top
U$24  OSHW-LOGOS  [OSHW-LOGO-S]  107.31,91.26 270 top
U$25  OSHW-LOGOS  [OSHW-LOGO-S]  133.22,18.87 270 top
U$26  OSHW-LOGOS  [OSHW-LOGO-S]  159.13,18.87 270 top
U$27  OSHW-LOGOS  [OSHW-LOGO-S]  185.03,18.87 270 top
U$28  OSHW-LOGOS  [OSHW-LOGO-S]  210.94,18.87 270 top
U$29  OSHW-LOGOS  [OSHW-LOGO-S]  133.22,33.35 270 top
U$30  OSHW-LOGOS  [OSHW-LOGO-S]  159.13,33.35 270 top
U$31  OSHW-LOGOS  [OSHW-LOGO-S]  185.03,33.35 270 top
U$32  OSHW-LOGOS  [OSHW-LOGO-S]  210.94,33.35 270 top
U$33  OSHW-LOGOS  [OSHW-LOGO-S]  133.22,47.83 270 top
U$34  OSHW-LOGOS  [OSHW-LOGO-S]  159.13,47.83 270 top
U$35  OSHW-LOGOS  [OSHW-LOGO-S]  185.03,47.83 270 top
U$36  OSHW-LOGOS  [OSHW-LOGO-S]  210.94,47.83 270 top
U$37  OSHW-LOGOS  [OSHW-LOGO-S]  133.22,62.3 270 top
U$38  OSHW-LOGOS  [OSHW-LOGO-S]  159.13,62.3 270 top
U$39  OSHW-LOGOS  [OSHW-LOGO-S]  185.03,62.3 270 top
U$40  OSHW-LOGOS  [OSHW-LOGO-S]  210.94,62.3 270 top
U$41  OSHW-LOGOS  [OSHW-LOGO-S]  133.22,76.78 270 top
U$42  OSHW-LOGOS  [OSHW-LOGO-S]  159.13,76.78 270 top
U$43  OSHW-LOGOS  [OSHW-LOGO-S]  185.03,76.78 270 top
U$44  OSHW-LOGOS  [OSHW-LOGO-S]  210.94,76.78 270 top
U$45  OSHW-LOGOS  [OSHW-LOGO-S]  133.22,91.26 270 top
U$46  OSHW-LOGOS  [OSHW-LOGO-S]  159.13,91.26 270 top
U$47  OSHW-LOGOS  [OSHW-LOGO-S]  185.03,91.26 270 top
U$48  OSHW-LOGOS  [OSHW-LOGO-S]  210.94,91.26 270 top

## Library data of the parts
C1-C240 = SparkFun-Capacitors; PROD_ID: CAP-00810; SPARKLE_ID: 918; VALUE: 0.1uF
E$1 = SparkFun-Retired
E$4 E$5 FID1-FID96 LOGO1-LOGO48 = SparkFun-Aesthetics
JP1-JP48 = SparkFun-Connectors; NO_PART: 1
U1-U48 = SparkFun-DigitalIC; PROD_ID: IC-08171
U$1-U$48 = SparkFun-Aesthetics; NO_PART: 1

## Nets
C1+: C1.1 U1.1
C1+1: C6.1 U2.1
C1+2: C11.1 U3.1
C1+3: C16.1 U4.1
C1+4: C21.1 U5.1
C1+5: C26.1 U6.1
C1+6: C31.1 U7.1
C1+7: C36.1 U8.1
C1+8: C41.1 U9.1
C1+9: C46.1 U10.1
C1+10: C51.1 U11.1
C1+11: C56.1 U12.1
C1+12: C61.1 U13.1
C1+13: C66.1 U14.1
C1+14: C71.1 U15.1
C1+15: C76.1 U16.1
C1+16: C81.1 U17.1
C1+17: C86.1 U18.1
C1+18: C91.1 U19.1
C1+19: C96.1 U20.1
C1+20: C101.1 U21.1
C1+21: C106.1 U22.1
C1+22: C111.1 U23.1
C1+23: C116.1 U24.1
C1+24: C121.1 U25.1
C1+25: C126.1 U26.1
C1+26: C131.1 U27.1
C1+27: C136.1 U28.1
C1+28: C141.1 U29.1
C1+29: C146.1 U30.1
C1+30: C151.1 U31.1
C1+31: C156.1 U32.1
C1+32: C161.1 U33.1
C1+33: C166.1 U34.1
C1+34: C171.1 U35.1
C1+35: C176.1 U36.1
C1+36: C181.1 U37.1
C1+37: C186.1 U38.1
C1+38: C191.1 U39.1
C1+39: C196.1 U40.1
C1+40: C201.1 U41.1
C1+41: C206.1 U42.1
C1+42: C211.1 U43.1
C1+43: C216.1 U44.1
C1+44: C221.1 U45.1
C1+45: C226.1 U46.1
C1+46: C231.1 U47.1
C1+47: C236.1 U48.1
C1-: C1.2 U1.3
C1-1: C6.2 U2.3
C1-2: C11.2 U3.3
C1-3: C16.2 U4.3
C1-4: C21.2 U5.3
C1-5: C26.2 U6.3
C1-6: C31.2 U7.3
C1-7: C36.2 U8.3
C1-8: C41.2 U9.3
C1-9: C46.2 U10.3
C1-10: C51.2 U11.3
C1-11: C56.2 U12.3
C1-12: C61.2 U13.3
C1-13: C66.2 U14.3
C1-14: C71.2 U15.3
C1-15: C76.2 U16.3
C1-16: C81.2 U17.3
C1-17: C86.2 U18.3
C1-18: C91.2 U19.3
C1-19: C96.2 U20.3
C1-20: C101.2 U21.3
C1-21: C106.2 U22.3
C1-22: C111.2 U23.3
C1-23: C116.2 U24.3
C1-24: C121.2 U25.3
C1-25: C126.2 U26.3
C1-26: C131.2 U27.3
C1-27: C136.2 U28.3
C1-28: C141.2 U29.3
C1-29: C146.2 U30.3
C1-30: C151.2 U31.3
C1-31: C156.2 U32.3
C1-32: C161.2 U33.3
C1-33: C166.2 U34.3
C1-34: C171.2 U35.3
C1-35: C176.2 U36.3
C1-36: C181.2 U37.3
C1-37: C186.2 U38.3
C1-38: C191.2 U39.3
C1-39: C196.2 U40.3
C1-40: C201.2 U41.3
C1-41: C206.2 U42.3
C1-42: C211.2 U43.3
C1-43: C216.2 U44.3
C1-44: C221.2 U45.3
C1-45: C226.2 U46.3
C1-46: C231.2 U47.3
C1-47: C236.2 U48.3
C2+: C2.1 U1.4
C2+1: C7.1 U2.4
C2+2: C12.1 U3.4
C2+3: C17.1 U4.4
C2+4: C22.1 U5.4
C2+5: C27.1 U6.4
C2+6: C32.1 U7.4
C2+7: C37.1 U8.4
C2+8: C42.1 U9.4
C2+9: C47.1 U10.4
C2+10: C52.1 U11.4
C2+11: C57.1 U12.4
C2+12: C62.1 U13.4
C2+13: C67.1 U14.4
C2+14: C72.1 U15.4
C2+15: C77.1 U16.4
C2+16: C82.1 U17.4
C2+17: C87.1 U18.4
C2+18: C92.1 U19.4
C2+19: C97.1 U20.4
C2+20: C102.1 U21.4
C2+21: C107.1 U22.4
C2+22: C112.1 U23.4
C2+23: C117.1 U24.4
C2+24: C122.1 U25.4
C2+25: C127.1 U26.4
C2+26: C132.1 U27.4
C2+27: C137.1 U28.4
C2+28: C142.1 U29.4
C2+29: C147.1 U30.4
C2+30: C152.1 U31.4
C2+31: C157.1 U32.4
C2+32: C162.1 U33.4
C2+33: C167.1 U34.4
C2+34: C172.1 U35.4
C2+35: C177.1 U36.4
C2+36: C182.1 U37.4
C2+37: C187.1 U38.4
C2+38: C192.1 U39.4
C2+39: C197.1 U40.4
C2+40: C202.1 U41.4
C2+41: C207.1 U42.4
C2+42: C212.1 U43.4
C2+43: C217.1 U44.4
C2+44: C222.1 U45.4
C2+45: C227.1 U46.4
C2+46: C232.1 U47.4
C2+47: C237.1 U48.4
C2-: C2.2 U1.5
C2-1: C7.2 U2.5
C2-2: C12.2 U3.5
C2-3: C17.2 U4.5
C2-4: C22.2 U5.5
C2-5: C27.2 U6.5
C2-6: C32.2 U7.5
C2-7: C37.2 U8.5
C2-8: C42.2 U9.5
C2-9: C47.2 U10.5
C2-10: C52.2 U11.5
C2-11: C57.2 U12.5
C2-12: C62.2 U13.5
C2-13: C67.2 U14.5
C2-14: C72.2 U15.5
C2-15: C77.2 U16.5
C2-16: C82.2 U17.5
C2-17: C87.2 U18.5
C2-18: C92.2 U19.5
C2-19: C97.2 U20.5
C2-20: C102.2 U21.5
C2-21: C107.2 U22.5
C2-22: C112.2 U23.5
C2-23: C117.2 U24.5
C2-24: C122.2 U25.5
C2-25: C127.2 U26.5
C2-26: C132.2 U27.5
C2-27: C137.2 U28.5
C2-28: C142.2 U29.5
C2-29: C147.2 U30.5
C2-30: C152.2 U31.5
C2-31: C157.2 U32.5
C2-32: C162.2 U33.5
C2-33: C167.2 U34.5
C2-34: C172.2 U35.5
C2-35: C177.2 U36.5
C2-36: C182.2 U37.5
C2-37: C187.2 U38.5
C2-38: C192.2 U39.5
C2-39: C197.2 U40.5
C2-40: C202.2 U41.5
C2-41: C207.2 U42.5
C2-42: C212.2 U43.5
C2-43: C217.2 U44.5
C2-44: C222.2 U45.5
C2-45: C227.2 U46.5
C2-46: C232.2 U47.5
C2-47: C237.2 U48.5
GND: C3.2 C4.2 C5.2 JP2.6 U1.15
GND1: C8.2 C9.2 C10.2 JP1.6 U2.15
GND2: C13.2 C14.2 C15.2 JP3.6 U3.15
GND3: C18.2 C19.2 C20.2 JP4.6 U4.15
GND4: C23.2 C24.2 C25.2 JP5.6 U5.15
GND5: C28.2 C29.2 C30.2 JP6.6 U6.15
GND6: C33.2 C34.2 C35.2 JP7.6 U7.15
GND7: C38.2 C39.2 C40.2 JP8.6 U8.15
GND8: C43.2 C44.2 C45.2 JP9.6 U9.15
GND9: C48.2 C49.2 C50.2 JP10.6 U10.15
GND10: C53.2 C54.2 C55.2 JP11.6 U11.15
GND11: C58.2 C59.2 C60.2 JP12.6 U12.15
GND12: C63.2 C64.2 C65.2 JP13.6 U13.15
GND13: C68.2 C69.2 C70.2 JP14.6 U14.15
GND14: C73.2 C74.2 C75.2 JP15.6 U15.15
GND15: C78.2 C79.2 C80.2 JP16.6 U16.15
GND16: C83.2 C84.2 C85.2 JP17.6 U17.15
GND17: C88.2 C89.2 C90.2 JP18.6 U18.15
GND18: C93.2 C94.2 C95.2 JP19.6 U19.15
GND19: C98.2 C99.2 C100.2 JP20.6 U20.15
GND20: C103.2 C104.2 C105.2 JP21.6 U21.15
GND21: C108.2 C109.2 C110.2 JP22.6 U22.15
GND22: C113.2 C114.2 C115.2 JP23.6 U23.15
GND23: C118.2 C119.2 C120.2 JP24.6 U24.15
GND24: C123.2 C124.2 C125.2 JP25.6 U25.15
GND25: C128.2 C129.2 C130.2 JP26.6 U26.15
GND26: C133.2 C134.2 C135.2 JP27.6 U27.15
GND27: C138.2 C139.2 C140.2 JP28.6 U28.15
GND28: C143.2 C144.2 C145.2 JP29.6 U29.15
GND29: C148.2 C149.2 C150.2 JP30.6 U30.15
GND30: C153.2 C154.2 C155.2 JP31.6 U31.15
GND31: C158.2 C159.2 C160.2 JP32.6 U32.15
GND32: C163.2 C164.2 C165.2 JP33.6 U33.15
GND33: C168.2 C169.2 C170.2 JP34.6 U34.15
GND34: C173.2 C174.2 C175.2 JP35.6 U35.15
GND35: C178.2 C179.2 C180.2 JP36.6 U36.15
GND36: C183.2 C184.2 C185.2 JP37.6 U37.15
GND37: C188.2 C189.2 C190.2 JP38.6 U38.15
GND38: C193.2 C194.2 C195.2 JP39.6 U39.15
GND39: C198.2 C199.2 C200.2 JP40.6 U40.15
GND40: C203.2 C204.2 C205.2 JP41.6 U41.15
GND41: C208.2 C209.2 C210.2 JP42.6 U42.15
GND42: C213.2 C214.2 C215.2 JP43.6 U43.15
GND43: C218.2 C219.2 C220.2 JP44.6 U44.15
GND44: C223.2 C224.2 C225.2 JP45.6 U45.15
GND45: C228.2 C229.2 C230.2 JP46.6 U46.15
GND46: C233.2 C234.2 C235.2 JP47.6 U47.15
GND47: C238.2 C239.2 C240.2 JP48.6 U48.15
R1IN: JP2.3 U1.13
R1IN1: JP1.3 U2.13
R1IN2: JP3.3 U3.13
R1IN3: JP4.3 U4.13
R1IN4: JP5.3 U5.13
R1IN5: JP6.3 U6.13
R1IN6: JP7.3 U7.13
R1IN7: JP8.3 U8.13
R1IN8: JP9.3 U9.13
R1IN9: JP10.3 U10.13
R1IN10: JP11.3 U11.13
R1IN11: JP12.3 U12.13
R1IN12: JP13.3 U13.13
R1IN13: JP14.3 U14.13
R1IN14: JP15.3 U15.13
R1IN15: JP16.3 U16.13
R1IN16: JP17.3 U17.13
R1IN17: JP18.3 U18.13
R1IN18: JP19.3 U19.13
R1IN19: JP20.3 U20.13
R1IN20: JP21.3 U21.13
R1IN21: JP22.3 U22.13
R1IN22: JP23.3 U23.13
R1IN23: JP24.3 U24.13
R1IN24: JP25.3 U25.13
R1IN25: JP26.3 U26.13
R1IN26: JP27.3 U27.13
R1IN27: JP28.3 U28.13
R1IN28: JP29.3 U29.13
R1IN29: JP30.3 U30.13
R1IN30: JP31.3 U31.13
R1IN31: JP32.3 U32.13
R1IN32: JP33.3 U33.13
R1IN33: JP34.3 U34.13
R1IN34: JP35.3 U35.13
R1IN35: JP36.3 U36.13
R1IN36: JP37.3 U37.13
R1IN37: JP38.3 U38.13
R1IN38: JP39.3 U39.13
R1IN39: JP40.3 U40.13
R1IN40: JP41.3 U41.13
R1IN41: JP42.3 U42.13
R1IN42: JP43.3 U43.13
R1IN43: JP44.3 U44.13
R1IN44: JP45.3 U45.13
R1IN45: JP46.3 U46.13
R1IN46: JP47.3 U47.13
R1IN47: JP48.3 U48.13
R1OUT: JP2.9 U1.12
R1OUT1: JP1.9 U2.12
R1OUT2: JP3.9 U3.12
R1OUT3: JP4.9 U4.12
R1OUT4: JP5.9 U5.12
R1OUT5: JP6.9 U6.12
R1OUT6: JP7.9 U7.12
R1OUT7: JP8.9 U8.12
R1OUT8: JP9.9 U9.12
R1OUT9: JP10.9 U10.12
R1OUT10: JP11.9 U11.12
R1OUT11: JP12.9 U12.12
R1OUT12: JP13.9 U13.12
R1OUT13: JP14.9 U14.12
R1OUT14: JP15.9 U15.12
R1OUT15: JP16.9 U16.12
R1OUT16: JP17.9 U17.12
R1OUT17: JP18.9 U18.12
R1OUT18: JP19.9 U19.12
R1OUT19: JP20.9 U20.12
R1OUT20: JP21.9 U21.12
R1OUT21: JP22.9 U22.12
R1OUT22: JP23.9 U23.12
R1OUT23: JP24.9 U24.12
R1OUT24: JP25.9 U25.12
R1OUT25: JP26.9 U26.12
R1OUT26: JP27.9 U27.12
R1OUT27: JP28.9 U28.12
R1OUT28: JP29.9 U29.12
R1OUT29: JP30.9 U30.12
R1OUT30: JP31.9 U31.12
R1OUT31: JP32.9 U32.12
R1OUT32: JP33.9 U33.12
R1OUT33: JP34.9 U34.12
R1OUT34: JP35.9 U35.12
R1OUT35: JP36.9 U36.12
R1OUT36: JP37.9 U37.12
R1OUT37: JP38.9 U38.12
R1OUT38: JP39.9 U39.12
R1OUT39: JP40.9 U40.12
R1OUT40: JP41.9 U41.12
R1OUT41: JP42.9 U42.12
R1OUT42: JP43.9 U43.12
R1OUT43: JP44.9 U44.12
R1OUT44: JP45.9 U45.12
R1OUT45: JP46.9 U46.12
R1OUT46: JP47.9 U47.12
R1OUT47: JP48.9 U48.12
R2IN: JP2.4 U1.8
R2IN1: JP1.4 U2.8
R2IN2: JP3.4 U3.8
R2IN3: JP4.4 U4.8
R2IN4: JP5.4 U5.8
R2IN5: JP6.4 U6.8
R2IN6: JP7.4 U7.8
R2IN7: JP8.4 U8.8
R2IN8: JP9.4 U9.8
R2IN9: JP10.4 U10.8
R2IN10: JP11.4 U11.8
R2IN11: JP12.4 U12.8
R2IN12: JP13.4 U13.8
R2IN13: JP14.4 U14.8
R2IN14: JP15.4 U15.8
R2IN15: JP16.4 U16.8
R2IN16: JP17.4 U17.8
R2IN17: JP18.4 U18.8
R2IN18: JP19.4 U19.8
R2IN19: JP20.4 U20.8
R2IN20: JP21.4 U21.8
R2IN21: JP22.4 U22.8
R2IN22: JP23.4 U23.8
R2IN23: JP24.4 U24.8
R2IN24: JP25.4 U25.8
R2IN25: JP26.4 U26.8
R2IN26: JP27.4 U27.8
R2IN27: JP28.4 U28.8
R2IN28: JP29.4 U29.8
R2IN29: JP30.4 U30.8
R2IN30: JP31.4 U31.8
R2IN31: JP32.4 U32.8
R2IN32: JP33.4 U33.8
R2IN33: JP34.4 U34.8
R2IN34: JP35.4 U35.8
R2IN35: JP36.4 U36.8
R2IN36: JP37.4 U37.8
R2IN37: JP38.4 U38.8
R2IN38: JP39.4 U39.8
R2IN39: JP40.4 U40.8
R2IN40: JP41.4 U41.8
R2IN41: JP42.4 U42.8
R2IN42: JP43.4 U43.8
R2IN43: JP44.4 U44.8
R2IN44: JP45.4 U45.8
R2IN45: JP46.4 U46.8
R2IN46: JP47.4 U47.8
R2IN47: JP48.4 U48.8
R2OUT: JP2.10 U1.9
R2OUT1: JP1.10 U2.9
R2OUT2: JP3.10 U3.9
R2OUT3: JP4.10 U4.9
R2OUT4: JP5.10 U5.9
R2OUT5: JP6.10 U6.9
R2OUT6: JP7.10 U7.9
R2OUT7: JP8.10 U8.9
R2OUT8: JP9.10 U9.9
R2OUT9: JP10.10 U10.9
R2OUT10: JP11.10 U11.9
R2OUT11: JP12.10 U12.9
R2OUT12: JP13.10 U13.9
R2OUT13: JP14.10 U14.9
R2OUT14: JP15.10 U15.9
R2OUT15: JP16.10 U16.9
R2OUT16: JP17.10 U17.9
R2OUT17: JP18.10 U18.9
R2OUT18: JP19.10 U19.9
R2OUT19: JP20.10 U20.9
R2OUT20: JP21.10 U21.9
R2OUT21: JP22.10 U22.9
R2OUT22: JP23.10 U23.9
R2OUT23: JP24.10 U24.9
R2OUT24: JP25.10 U25.9
R2OUT25: JP26.10 U26.9
R2OUT26: JP27.10 U27.9
R2OUT27: JP28.10 U28.9
R2OUT28: JP29.10 U29.9
R2OUT29: JP30.10 U30.9
R2OUT30: JP31.10 U31.9
R2OUT31: JP32.10 U32.9
R2OUT32: JP33.10 U33.9
R2OUT33: JP34.10 U34.9
R2OUT34: JP35.10 U35.9
R2OUT35: JP36.10 U36.9
R2OUT36: JP37.10 U37.9
R2OUT37: JP38.10 U38.9
R2OUT38: JP39.10 U39.9
R2OUT39: JP40.10 U40.9
R2OUT40: JP41.10 U41.9
R2OUT41: JP42.10 U42.9
R2OUT42: JP43.10 U43.9
R2OUT43: JP44.10 U44.9
R2OUT44: JP45.10 U45.9
R2OUT45: JP46.10 U46.9
R2OUT46: JP47.10 U47.9
R2OUT47: JP48.10 U48.9
T1IN: JP2.7 U1.11
T1IN1: JP1.7 U2.11
T1IN2: JP3.7 U3.11
T1IN3: JP4.7 U4.11
T1IN4: JP5.7 U5.11
T1IN5: JP6.7 U6.11
T1IN6: JP7.7 U7.11
T1IN7: JP8.7 U8.11
T1IN8: JP9.7 U9.11
T1IN9: JP10.7 U10.11
T1IN10: JP11.7 U11.11
T1IN11: JP12.7 U12.11
T1IN12: JP13.7 U13.11
T1IN13: JP14.7 U14.11
T1IN14: JP15.7 U15.11
T1IN15: JP16.7 U16.11
T1IN16: JP17.7 U17.11
T1IN17: JP18.7 U18.11
T1IN18: JP19.7 U19.11
T1IN19: JP20.7 U20.11
T1IN20: JP21.7 U21.11
T1IN21: JP22.7 U22.11
T1IN22: JP23.7 U23.11
T1IN23: JP24.7 U24.11
T1IN24: JP25.7 U25.11
T1IN25: JP26.7 U26.11
T1IN26: JP27.7 U27.11
T1IN27: JP28.7 U28.11
T1IN28: JP29.7 U29.11
T1IN29: JP30.7 U30.11
T1IN30: JP31.7 U31.11
T1IN31: JP32.7 U32.11
T1IN32: JP33.7 U33.11
T1IN33: JP34.7 U34.11
T1IN34: JP35.7 U35.11
T1IN35: JP36.7 U36.11
T1IN36: JP37.7 U37.11
T1IN37: JP38.7 U38.11
T1IN38: JP39.7 U39.11
T1IN39: JP40.7 U40.11
T1IN40: JP41.7 U41.11
T1IN41: JP42.7 U42.11
T1IN42: JP43.7 U43.11
T1IN43: JP44.7 U44.11
T1IN44: JP45.7 U45.11
T1IN45: JP46.7 U46.11
T1IN46: JP47.7 U47.11
T1IN47: JP48.7 U48.11
T1OUT: JP2.1 U1.14
T1OUT1: JP1.1 U2.14
T1OUT2: JP3.1 U3.14
T1OUT3: JP4.1 U4.14
T1OUT4: JP5.1 U5.14
T1OUT5: JP6.1 U6.14
T1OUT6: JP7.1 U7.14
T1OUT7: JP8.1 U8.14
T1OUT8: JP9.1 U9.14
T1OUT9: JP10.1 U10.14
T1OUT10: JP11.1 U11.14
T1OUT11: JP12.1 U12.14
T1OUT12: JP13.1 U13.14
T1OUT13: JP14.1 U14.14
T1OUT14: JP15.1 U15.14
T1OUT15: JP16.1 U16.14
T1OUT16: JP17.1 U17.14
T1OUT17: JP18.1 U18.14
T1OUT18: JP19.1 U19.14
T1OUT19: JP20.1 U20.14
T1OUT20: JP21.1 U21.14
T1OUT21: JP22.1 U22.14
T1OUT22: JP23.1 U23.14
T1OUT23: JP24.1 U24.14
T1OUT24: JP25.1 U25.14
T1OUT25: JP26.1 U26.14
T1OUT26: JP27.1 U27.14
T1OUT27: JP28.1 U28.14
T1OUT28: JP29.1 U29.14
T1OUT29: JP30.1 U30.14
T1OUT30: JP31.1 U31.14
T1OUT31: JP32.1 U32.14
T1OUT32: JP33.1 U33.14
T1OUT33: JP34.1 U34.14
T1OUT34: JP35.1 U35.14
T1OUT35: JP36.1 U36.14
T1OUT36: JP37.1 U37.14
T1OUT37: JP38.1 U38.14
T1OUT38: JP39.1 U39.14
T1OUT39: JP40.1 U40.14
T1OUT40: JP41.1 U41.14
T1OUT41: JP42.1 U42.14
T1OUT42: JP43.1 U43.14
T1OUT43: JP44.1 U44.14
T1OUT44: JP45.1 U45.14
T1OUT45: JP46.1 U46.14
T1OUT46: JP47.1 U47.14
T1OUT47: JP48.1 U48.14
T2IN: JP2.8 U1.10
T2IN1: JP1.8 U2.10
T2IN2: JP3.8 U3.10
T2IN3: JP4.8 U4.10
T2IN4: JP5.8 U5.10
T2IN5: JP6.8 U6.10
T2IN6: JP7.8 U7.10
T2IN7: JP8.8 U8.10
T2IN8: JP9.8 U9.10
T2IN9: JP10.8 U10.10
T2IN10: JP11.8 U11.10
T2IN11: JP12.8 U12.10
T2IN12: JP13.8 U13.10
T2IN13: JP14.8 U14.10
T2IN14: JP15.8 U15.10
T2IN15: JP16.8 U16.10
T2IN16: JP17.8 U17.10
T2IN17: JP18.8 U18.10
T2IN18: JP19.8 U19.10
T2IN19: JP20.8 U20.10
T2IN20: JP21.8 U21.10
T2IN21: JP22.8 U22.10
T2IN22: JP23.8 U23.10
T2IN23: JP24.8 U24.10
T2IN24: JP25.8 U25.10
T2IN25: JP26.8 U26.10
T2IN26: JP27.8 U27.10
T2IN27: JP28.8 U28.10
T2IN28: JP29.8 U29.10
T2IN29: JP30.8 U30.10
T2IN30: JP31.8 U31.10
T2IN31: JP32.8 U32.10
T2IN32: JP33.8 U33.10
T2IN33: JP34.8 U34.10
T2IN34: JP35.8 U35.10
T2IN35: JP36.8 U36.10
T2IN36: JP37.8 U37.10
T2IN37: JP38.8 U38.10
T2IN38: JP39.8 U39.10
T2IN39: JP40.8 U40.10
T2IN40: JP41.8 U41.10
T2IN41: JP42.8 U42.10
T2IN42: JP43.8 U43.10
T2IN43: JP44.8 U44.10
T2IN44: JP45.8 U45.10
T2IN45: JP46.8 U46.10
T2IN46: JP47.8 U47.10
T2IN47: JP48.8 U48.10
T2OUT: JP2.2 U1.7
T2OUT1: JP1.2 U2.7
T2OUT2: JP3.2 U3.7
T2OUT3: JP4.2 U4.7
T2OUT4: JP5.2 U5.7
T2OUT5: JP6.2 U6.7
T2OUT6: JP7.2 U7.7
T2OUT7: JP8.2 U8.7
T2OUT8: JP9.2 U9.7
T2OUT9: JP10.2 U10.7
T2OUT10: JP11.2 U11.7
T2OUT11: JP12.2 U12.7
T2OUT12: JP13.2 U13.7
T2OUT13: JP14.2 U14.7
T2OUT14: JP15.2 U15.7
T2OUT15: JP16.2 U16.7
T2OUT16: JP17.2 U17.7
T2OUT17: JP18.2 U18.7
T2OUT18: JP19.2 U19.7
T2OUT19: JP20.2 U20.7
T2OUT20: JP21.2 U21.7
T2OUT21: JP22.2 U22.7
T2OUT22: JP23.2 U23.7
T2OUT23: JP24.2 U24.7
T2OUT24: JP25.2 U25.7
T2OUT25: JP26.2 U26.7
T2OUT26: JP27.2 U27.7
T2OUT27: JP28.2 U28.7
T2OUT28: JP29.2 U29.7
T2OUT29: JP30.2 U30.7
T2OUT30: JP31.2 U31.7
T2OUT31: JP32.2 U32.7
T2OUT32: JP33.2 U33.7
T2OUT33: JP34.2 U34.7
T2OUT34: JP35.2 U35.7
T2OUT35: JP36.2 U36.7
T2OUT36: JP37.2 U37.7
T2OUT37: JP38.2 U38.7
T2OUT38: JP39.2 U39.7
T2OUT39: JP40.2 U40.7
T2OUT40: JP41.2 U41.7
T2OUT41: JP42.2 U42.7
T2OUT42: JP43.2 U43.7
T2OUT43: JP44.2 U44.7
T2OUT44: JP45.2 U45.7
T2OUT45: JP46.2 U46.7
T2OUT46: JP47.2 U47.7
T2OUT47: JP48.2 U48.7
V+: C3.1 U1.2
V+1: C8.1 U2.2
V+2: C13.1 U3.2
V+3: C18.1 U4.2
V+4: C23.1 U5.2
V+5: C28.1 U6.2
V+6: C33.1 U7.2
V+7: C38.1 U8.2
V+8: C43.1 U9.2
V+9: C48.1 U10.2
V+10: C53.1 U11.2
V+11: C58.1 U12.2
V+12: C63.1 U13.2
V+13: C68.1 U14.2
V+14: C73.1 U15.2
V+15: C78.1 U16.2
V+16: C83.1 U17.2
V+17: C88.1 U18.2
V+18: C93.1 U19.2
V+19: C98.1 U20.2
V+20: C103.1 U21.2
V+21: C108.1 U22.2
V+22: C113.1 U23.2
V+23: C118.1 U24.2
V+24: C123.1 U25.2
V+25: C128.1 U26.2
V+26: C133.1 U27.2
V+27: C138.1 U28.2
V+28: C143.1 U29.2
V+29: C148.1 U30.2
V+30: C153.1 U31.2
V+31: C158.1 U32.2
V+32: C163.1 U33.2
V+33: C168.1 U34.2
V+34: C173.1 U35.2
V+35: C178.1 U36.2
V+36: C183.1 U37.2
V+37: C188.1 U38.2
V+38: C193.1 U39.2
V+39: C198.1 U40.2
V+40: C203.1 U41.2
V+41: C208.1 U42.2
V+42: C213.1 U43.2
V+43: C218.1 U44.2
V+44: C223.1 U45.2
V+45: C228.1 U46.2
V+46: C233.1 U47.2
V+47: C238.1 U48.2
V-: C4.1 U1.6
V-1: C9.1 U2.6
V-2: C14.1 U3.6
V-3: C19.1 U4.6
V-4: C24.1 U5.6
V-5: C29.1 U6.6
V-6: C34.1 U7.6
V-7: C39.1 U8.6
V-8: C44.1 U9.6
V-9: C49.1 U10.6
V-10: C54.1 U11.6
V-11: C59.1 U12.6
V-12: C64.1 U13.6
V-13: C69.1 U14.6
V-14: C74.1 U15.6
V-15: C79.1 U16.6
V-16: C84.1 U17.6
V-17: C89.1 U18.6
V-18: C94.1 U19.6
V-19: C99.1 U20.6
V-20: C104.1 U21.6
V-21: C109.1 U22.6
V-22: C114.1 U23.6
V-23: C119.1 U24.6
V-24: C124.1 U25.6
V-25: C129.1 U26.6
V-26: C134.1 U27.6
V-27: C139.1 U28.6
V-28: C144.1 U29.6
V-29: C149.1 U30.6
V-30: C154.1 U31.6
V-31: C159.1 U32.6
V-32: C164.1 U33.6
V-33: C169.1 U34.6
V-34: C174.1 U35.6
V-35: C179.1 U36.6
V-36: C184.1 U37.6
V-37: C189.1 U38.6
V-38: C194.1 U39.6
V-39: C199.1 U40.6
V-40: C204.1 U41.6
V-41: C209.1 U42.6
V-42: C214.1 U43.6
V-43: C219.1 U44.6
V-44: C224.1 U45.6
V-45: C229.1 U46.6
V-46: C234.1 U47.6
V-47: C239.1 U48.6
VCC: C5.1 JP2.5 U1.16
VCC1: C10.1 JP1.5 U2.16
VCC2: C15.1 JP3.5 U3.16
VCC3: C20.1 JP4.5 U4.16
VCC4: C25.1 JP5.5 U5.16
VCC5: C30.1 JP6.5 U6.16
VCC6: C35.1 JP7.5 U7.16
VCC7: C40.1 JP8.5 U8.16
VCC8: C45.1 JP9.5 U9.16
VCC9: C50.1 JP10.5 U10.16
VCC10: C55.1 JP11.5 U11.16
VCC11: C60.1 JP12.5 U12.16
VCC12: C65.1 JP13.5 U13.16
VCC13: C70.1 JP14.5 U14.16
VCC14: C75.1 JP15.5 U15.16
VCC15: C80.1 JP16.5 U16.16
VCC16: C85.1 JP17.5 U17.16
VCC17: C90.1 JP18.5 U18.16
VCC18: C95.1 JP19.5 U19.16
VCC19: C100.1 JP20.5 U20.16
VCC20: C105.1 JP21.5 U21.16
VCC21: C110.1 JP22.5 U22.16
VCC22: C115.1 JP23.5 U23.16
VCC23: C120.1 JP24.5 U24.16
VCC24: C125.1 JP25.5 U25.16
VCC25: C130.1 JP26.5 U26.16
VCC26: C135.1 JP27.5 U27.16
VCC27: C140.1 JP28.5 U28.16
VCC28: C145.1 JP29.5 U29.16
VCC29: C150.1 JP30.5 U30.16
VCC30: C155.1 JP31.5 U31.16
VCC31: C160.1 JP32.5 U32.16
VCC32: C165.1 JP33.5 U33.16
VCC33: C170.1 JP34.5 U34.16
VCC34: C175.1 JP35.5 U35.16
VCC35: C180.1 JP36.5 U36.16
VCC36: C185.1 JP37.5 U37.16
VCC37: C190.1 JP38.5 U38.16
VCC38: C195.1 JP39.5 U39.16
VCC39: C200.1 JP40.5 U40.16
VCC40: C205.1 JP41.5 U41.16
VCC41: C210.1 JP42.5 U42.16
VCC42: C215.1 JP43.5 U43.16
VCC43: C220.1 JP44.5 U44.16
VCC44: C225.1 JP45.5 U45.16
VCC45: C230.1 JP46.5 U46.16
VCC46: C235.1 JP47.5 U47.16
VCC47: C240.1 JP48.5 U48.16

## Tracks (layer width: path | path; a pad name or v marks a point on that pad's centre or on a via)
C1+
  Top 0.254: U1.1 24,18 24.73,18.73 C1.1
C1+1
  Top 0.254: U2.1 49.91,18 50.64,18.73 C6.1
C1+2
  Top 0.254: U3.1 75.82,18 76.55,18.73 C11.1
C1+3
  Top 0.254: U4.1 101.73,18 102.45,18.73 C16.1
C1+4
  Top 0.254: U5.1 24,32.48 24.73,33.2 C21.1
C1+5
  Top 0.254: U6.1 49.91,32.48 50.64,33.2 C26.1
C1+6
  Top 0.254: U7.1 75.82,32.48 76.55,33.2 C31.1
C1+7
  Top 0.254: U8.1 101.73,32.48 102.45,33.2 C36.1
C1+8
  Top 0.254: U9.1 24,46.95 24.73,47.68 C41.1
C1+9
  Top 0.254: U10.1 49.91,46.95 50.64,47.68 C46.1
C1+10
  Top 0.254: U11.1 75.82,46.95 76.55,47.68 C51.1
C1+11
  Top 0.254: U12.1 101.73,46.95 102.45,47.68 C56.1
C1+12
  Top 0.254: U13.1 24,61.43 24.73,62.16 C61.1
C1+13
  Top 0.254: U14.1 49.91,61.43 50.64,62.16 C66.1
C1+14
  Top 0.254: U15.1 75.82,61.43 76.55,62.16 C71.1
C1+15
  Top 0.254: U16.1 101.73,61.43 102.45,62.16 C76.1
C1+16
  Top 0.254: U17.1 24,75.91 24.73,76.64 C81.1
C1+17
  Top 0.254: U18.1 49.91,75.91 50.64,76.64 C86.1
C1+18
  Top 0.254: U19.1 75.82,75.91 76.55,76.64 C91.1
C1+19
  Top 0.254: U20.1 101.73,75.91 102.45,76.64 C96.1
C1+20
  Top 0.254: U21.1 24,90.39 24.73,91.11 C101.1
C1+21
  Top 0.254: U22.1 49.91,90.39 50.64,91.11 C106.1
C1+22
  Top 0.254: U23.1 75.82,90.39 76.55,91.11 C111.1
C1+23
  Top 0.254: U24.1 101.73,90.39 102.45,91.11 C116.1
C1+24
  Top 0.254: U25.1 127.64,18 128.36,18.73 C121.1
C1+25
  Top 0.254: U26.1 153.54,18 154.27,18.73 C126.1
C1+26
  Top 0.254: U27.1 179.45,18 180.18,18.73 C131.1
C1+27
  Top 0.254: U28.1 205.36,18 206.09,18.73 C136.1
C1+28
  Top 0.254: U29.1 127.64,32.48 128.36,33.2 C141.1
C1+29
  Top 0.254: U30.1 153.54,32.48 154.27,33.2 C146.1
C1+30
  Top 0.254: U31.1 179.45,32.48 180.18,33.2 C151.1
C1+31
  Top 0.254: U32.1 205.36,32.48 206.09,33.2 C156.1
C1+32
  Top 0.254: U33.1 127.64,46.95 128.36,47.68 C161.1
C1+33
  Top 0.254: U34.1 153.54,46.95 154.27,47.68 C166.1
C1+34
  Top 0.254: U35.1 179.45,46.95 180.18,47.68 C171.1
C1+35
  Top 0.254: U36.1 205.36,46.95 206.09,47.68 C176.1
C1+36
  Top 0.254: U37.1 127.64,61.43 128.36,62.16 C181.1
C1+37
  Top 0.254: U38.1 153.54,61.43 154.27,62.16 C186.1
C1+38
  Top 0.254: U39.1 179.45,61.43 180.18,62.16 C191.1
C1+39
  Top 0.254: U40.1 205.36,61.43 206.09,62.16 C196.1
C1+40
  Top 0.254: U41.1 127.64,75.91 128.36,76.64 C201.1
C1+41
  Top 0.254: U42.1 153.54,75.91 154.27,76.64 C206.1
C1+42
  Top 0.254: U43.1 179.45,75.91 180.18,76.64 C211.1
C1+43
  Top 0.254: U44.1 205.36,75.91 206.09,76.64 C216.1
C1+44
  Top 0.254: U45.1 127.64,90.39 128.36,91.11 C221.1
C1+45
  Top 0.254: U46.1 153.54,90.39 154.27,91.11 C226.1
C1+46
  Top 0.254: U47.1 179.45,90.39 180.18,91.11 C231.1
C1+47
  Top 0.254: U48.1 205.36,90.39 206.09,91.11 C236.1
C1-
  Top 0.254: U1.3 21.46,18.16 21.72,18.41 22.61,18.41 22.99,18.8 22.99,19.52 C1.2
C1-1
  Top 0.254: U2.3 47.37,18.16 47.62,18.41 48.51,18.41 48.9,18.8 48.9,19.52 C6.2
C1-2
  Top 0.254: U3.3 73.28,18.16 73.53,18.41 74.42,18.41 74.8,18.8 74.8,19.52 C11.2
C1-3
  Top 0.254: U4.3 99.19,18.16 99.44,18.41 100.33,18.41 100.71,18.8 100.71,19.52 C16.2
C1-4
  Top 0.254: U5.3 21.46,32.64 21.72,32.89 22.61,32.89 22.99,33.27 22.99,34 C21.2
C1-5
  Top 0.254: U6.3 47.37,32.64 47.62,32.89 48.51,32.89 48.9,33.27 48.9,34 C26.2
C1-6
  Top 0.254: U7.3 73.28,32.64 73.53,32.89 74.42,32.89 74.8,33.27 74.8,34 C31.2
C1-7
  Top 0.254: U8.3 99.19,32.64 99.44,32.89 100.33,32.89 100.71,33.27 100.71,34 C36.2
C1-8
  Top 0.254: U9.3 21.46,47.12 21.72,47.37 22.61,47.37 22.99,47.75 22.99,48.48 C41.2
C1-9
  Top 0.254: U10.3 47.37,47.12 47.62,47.37 48.51,47.37 48.9,47.75 48.9,48.48 C46.2
C1-10
  Top 0.254: U11.3 73.28,47.12 73.53,47.37 74.42,47.37 74.8,47.75 74.8,48.48 C51.2
C1-11
  Top 0.254: U12.3 99.19,47.12 99.44,47.37 100.33,47.37 100.71,47.75 100.71,48.48 C56.2
C1-12
  Top 0.254: U13.3 21.46,61.59 21.72,61.85 22.61,61.85 22.99,62.23 22.99,62.95 C61.2
C1-13
  Top 0.254: U14.3 47.37,61.59 47.62,61.85 48.51,61.85 48.9,62.23 48.9,62.95 C66.2
C1-14
  Top 0.254: U15.3 73.28,61.59 73.53,61.85 74.42,61.85 74.8,62.23 74.8,62.95 C71.2
C1-15
  Top 0.254: U16.3 99.19,61.59 99.44,61.85 100.33,61.85 100.71,62.23 100.71,62.95 C76.2
C1-16
  Top 0.254: U17.3 21.46,76.07 21.72,76.33 22.61,76.33 22.99,76.71 22.99,77.43 C81.2
C1-17
  Top 0.254: U18.3 47.37,76.07 47.62,76.33 48.51,76.33 48.9,76.71 48.9,77.43 C86.2
C1-18
  Top 0.254: U19.3 73.28,76.07 73.53,76.33 74.42,76.33 74.8,76.71 74.8,77.43 C91.2
C1-19
  Top 0.254: U20.3 99.19,76.07 99.44,76.33 100.33,76.33 100.71,76.71 100.71,77.43 C96.2
C1-20
  Top 0.254: U21.3 21.46,90.55 21.72,90.81 22.61,90.81 22.99,91.19 22.99,91.91 C101.2
C1-21
  Top 0.254: U22.3 47.37,90.55 47.62,90.81 48.51,90.81 48.9,91.19 48.9,91.91 C106.2
C1-22
  Top 0.254: U23.3 73.28,90.55 73.53,90.81 74.42,90.81 74.8,91.19 74.8,91.91 C111.2
C1-23
  Top 0.254: U24.3 99.19,90.55 99.44,90.81 100.33,90.81 100.71,91.19 100.71,91.91 C116.2
C1-24
  Top 0.254: U25.3 125.09,18.16 125.35,18.41 126.24,18.41 126.62,18.8 126.62,19.52 C121.2
C1-25